# EAGLE board LIS344ALH (EAGLE 9.6.2)
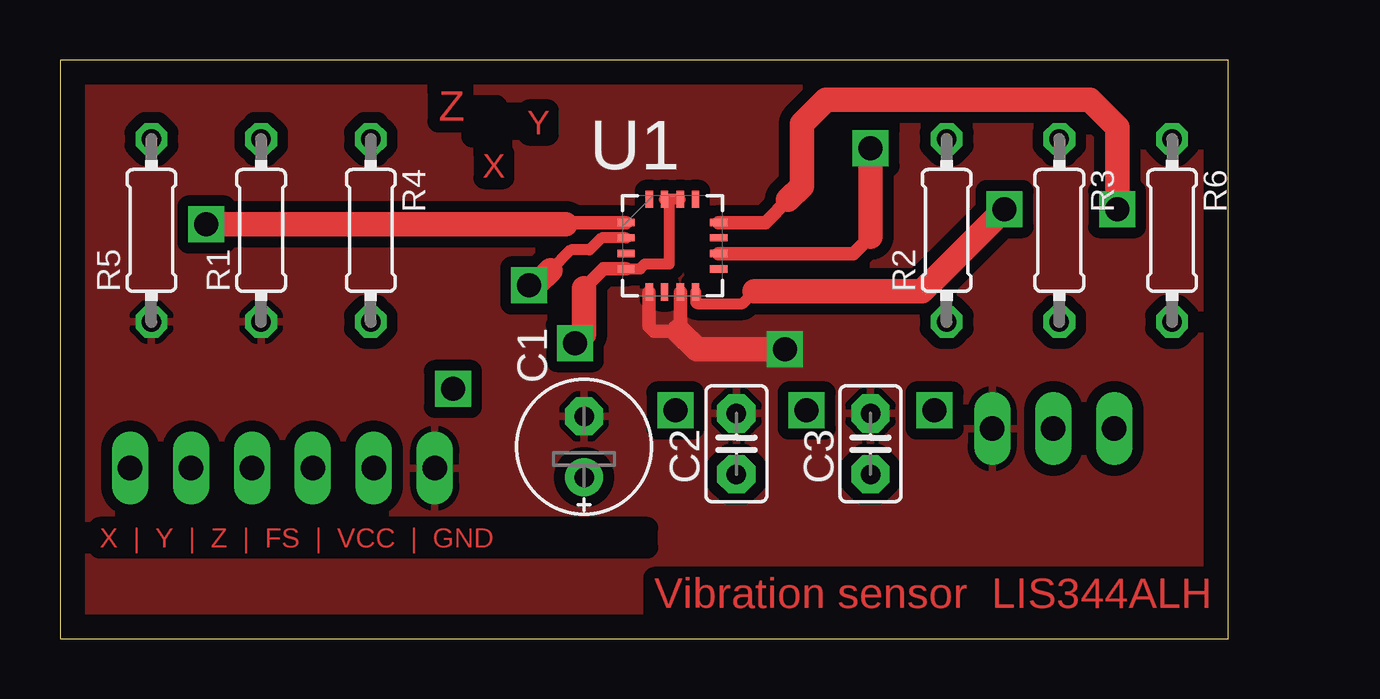
[diagram p0: board, top side]
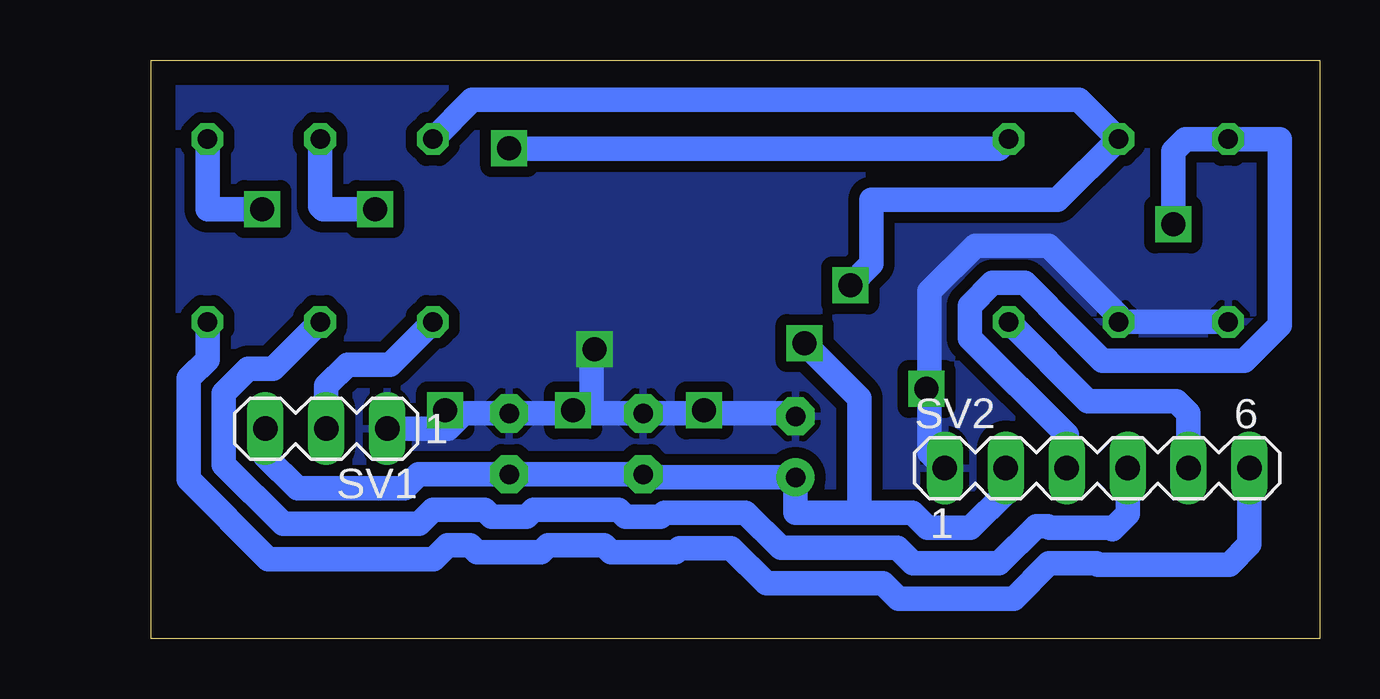
[diagram p1: board, bottom side, seen from below]

Size 48.69 x 24.12 mm. Coordinates in mm from the lower left corner, seen from the top.
Outline: 0,0 48.69,0 48.69,24.12 0,24.12 0,0
Copper layers (1*16): Top 0.035mm / dielectric 1.5mm / Bottom 0.035mm
Design rules "default *": minimum track width 18mil, minimum drill 1mm, track to track 18mil, track to pad 18mil, pad to pad 18mil, via to via 18mil, smd to smd 6mil, copper to edge 40mil, drill to drill 6mil, minimum pad ring 10mil, minimum via ring 8mil, stop-mask expansion 4mil, vias tented up to drill 0mil, thermal gap 10mil

## Footprints (pad centres in the part's own frame; a part is rotated, then mirrored left to right if it is on the bottom)
E2,5-6E = drill 0.813 pad 1.575: + -1.27,0 | drill 0.813 pad 1.575 octagon: - 1.27,0
C2.5-2 = drill 0.813 pad 1.6 octagon: 1 -1.27,0; 2 1.27,0
0204/7 = drill 0.813 octagon: 1 -3.81,0; 2 3.81,0
MA03-1 = drill 1.016 long: 1 -2.54,0; 2 0,0; 3 2.54,0
MA06-1 = drill 1.016 long: 1 -6.35,0; 2 -3.81,0; 3 -1.27,0; 4 1.27,0; 5 3.81,0; 6 6.35,0
LGA16R65P4X4_400X400X160 = smd 0.711 x 0.305: 1 -1.93,0.965; 2 -1.93,0.33; 3 -1.93,-0.33; 4 -1.93,-0.965; 9 1.93,-0.965; 10 1.93,-0.33; 11 1.93,0.33; 12 1.93,0.965 | smd 0.305 x 0.711: 5 -0.965,-1.93; 6 -0.33,-1.93; 7 0.33,-1.93; 8 0.965,-1.93; 13 0.965,1.93; 14 0.33,1.93; 15 -0.33,1.93; 16 -0.965,1.93

## Placement (x,y rotation side)
C1  2.2uF  [E2,5-6E]  21.84,8 90 top
C2  100nF  [C2.5-2]  28.19,8.13 90 top
C3  100nF  [C2.5-2]  33.78,8.13 90 top
R1  100k  [0204/7]  8.38,17.02 90 top
R2  1k  [0204/7]  36.96,17.02 90 top
R3  1k  [0204/7]  41.66,17.02 270 top
R4  1k  [0204/7]  12.95,17.02 270 top
R5  100k  [0204/7]  3.81,17.02 90 top
R6  1k  [0204/7]  46.36,17.02 270 top
SV1  [MA03-1]  41.4,8.76 180 bottom
SV2  [MA06-1]  9.27,7.11 0 bottom
U1  LIS344ALH  [LGA16R65P4X4_400X400X160]  25.53,16.38 0 top

## Library data of the parts
C1 = rcl; SPICEPREFIX: C
C2 C3 = capacitor-wima
R1-R6 = rcl; SPICEPREFIX: R
SV1 SV2 = con-lstb; OC_FARNELL: unknown; OC_NEWARK: unknown
U1 = LIS344ALH; AVAILABILITY: In Stock; CHECK_PRICES: https://www.snapeda.com/parts/LIS344ALH/STMicroelectronics/view-part/?ref=eda; DESCRIPTION: Accelerometer X, Y, Z Axis ±2g, 6g 1.8kHz 16-LGA (4x4); MF: STMicroelectronics; MP: LIS344ALH; PACKAGE: LGA-16 STMicroelectronics; PRICE: None; SNAPEDA_LINK: https://www.snapeda.com/parts/LIS344ALH/STMicroelectronics/view-part/?ref=snap

## Nets
GND: C1.- C2.2 C3.2 R1.1 R5.1 SV1.1 SV2.1 U1.5 U1.7
N$1: R6.1 U1.12
N$2: R4.1 U1.10
N$3: R3.1 U1.8
N$4: R6.2 SV2.6
N$5: R4.2 SV2.5
N$6: R3.2 SV2.4
N$7: R2.1 SV1.2
N$8: R1.2 R2.2 U1.2
N$11: R5.2 SV2.3 U1.1
VCC: C1.+ C2.1 C3.1 SV1.3 SV2.2 U1.4 U1.14 U1.15

## Tracks (layer width: path | path; a pad name or v marks a point on that pad's centre or on a via)
GND  (via drill 1)
  Top 0.559: U1.7 25.86,12.9 25.78,12.83 24.77,12.83 24.56,13.03 U1.5
  Top 1.016: v30.23,12.06 26.54,12.06 25.78,12.83
  Bottom 1.016: C1.- 21.97,9.4 C2.2 30.35,9.4 | 30.35,9.4 C3.2 35.69,9.4 36.32,8.76 SV1.1 | v30.23,12.06 30.35,11.94 30.35,9.4 | R5.1 R1.1 8.38,13.46 11.3,16.38 14.35,16.38 16.26,14.48 16.26,10.67 16.26,7.75 SV2.1
  pour Top: 0,24.13 48.77,24.13 48.77,0 0,0
  pour Bottom: 0,24.13 48.77,24.13 48.77,0 0,0
N$1  (via drill 1)
  Top 0.559: U1.12 29.41,17.35 30.35,18.29
  Top 1.016: 30.35,18.29 30.92,18.86 30.92,21.47 31.93,22.47 42.93,22.47 44.07,21.33 v44.07,17.91
  Bottom 1.016: R6.1 46.36,17.91 v44.07,17.91
N$2  (via drill 1)
  Top 0.559: U1.10 33.07,16.05 33.78,16.76 | v33.78,20.44 v33.78,20.45
  Top 1.016: v33.78,20.44 33.78,16.76
  Bottom 1.016: v33.78,20.44 33.76,20.42 13.36,20.42 R4.1
N$3  (via drill 1)
  Top 0.457: U1.8 26.49,14.02 26.54,13.97 28.45,13.97 28.96,14.48
  Top 1.016: v39.37,17.91 36.3,14.83 36.28,14.83 35.93,14.48 28.96,14.48
  Bottom 1.016: R3.1 41.66,18.03 41.53,17.91 v39.37,17.91
N$4
  Bottom 1.016: R6.2 46.36,11.64 47.14,10.85 47.14,6.65 43.82,3.33 36.93,3.33 36.34,3.91 35.42,3.91 35.12,3.62 32.44,3.62 32.15,3.91 29.83,3.91 29.53,3.62 26.85,3.62 26.69,3.79 24.53,3.79 23.06,2.32 18.2,2.32 17.56,1.68 12.75,1.68 11.28,3.15 9.3,3.15 9.25,3.1 3.76,3.1 2.92,3.94 SV2.6
N$5
  Bottom 1.016: R4.2 9.65,9.91 5.97,9.91 5.46,9.4 SV2.5
N$6
  Bottom 1.016: R3.2 43.61,11.25 44.66,11.25 45.67,10.24 45.67,7.26 43.21,4.8 37.54,4.8 36.95,5.39 34.81,5.39 34.51,5.09 33.05,5.09 32.76,5.39 29.22,5.39 28.92,5.09 27.46,5.09 27.3,5.26 23.92,5.26 22.45,3.79 17.59,3.79 16.95,3.15 13.36,3.15 11.81,4.7 11.33,4.7 11.26,4.62 8.69,4.62 8.64,4.57 8,5.21 SV2.4
N$7
  Bottom 1.016: R2.1 38.73,11.43 40.51,11.43 41.4,10.54 SV1.2
N$8  (via drill 1)
  Top 0.457: U1.2 22.58,16.71 22.07,16.2 21.28,16.2 20.45,15.37
  Top 1.016: v19.56,14.73 19.81,14.73 20.45,15.37
  Bottom 1.016: R2.2 35.32,22.47 10.02,22.47 R1.2 10.92,18.29 18.67,18.29 18.67,15.62 v19.56,14.73
N$9  (via drill 1 pad 0.38)
  other vias: 25.65,9.52
N$10  (via drill 1 pad 0.38)
  other vias: 31.11,9.52
N$11  (via drill 1)
  Top 0.559: U1.1 21.16,17.35 21.08,17.27
  Top 1.016: 21.08,17.27 v6.1,17.27
  Bottom 1.016: SV2.3 10.54,8.5 14.58,12.54 14.58,13.88 13.63,14.83 12.28,14.83 11.33,13.88 11.33,13.86 9.05,11.58 3.14,11.58 1.65,13.07 1.65,20.83 R5.2 5.59,20.83 6.1,20.32 v6.1,17.27
N$12  (via drill 1 pad 0.38)
  other vias: 36.45,9.52
N$13  (via drill 1 pad 0.38)
  other vias: 16.38,10.41
VCC  (via drill 1)
  Top 0.457: U1.14 U1.15 25.4,18.11 25.4,15.62 24.38,15.62 24.18,15.42 U1.4
  Top 0.559: 21.84,14.61 22.66,15.42 U1.4
  Top 1.016: v21.46,12.32 21.84,12.7 21.84,14.61
  Bottom 1.016: 19.18,5.26 21.84,5.26 C1.+ 28.07,6.73 C2.1 C3.1 37.56,6.86 38.15,6.27 42.6,6.27 43.94,7.62 SV1.3 | 19.18,5.26 16.98,5.26 16.34,4.62 14.55,4.62 13.08,6.1 SV2.2 | 19.18,5.26 19.18,10.03 v21.46,12.32

## Text on the board
Top: Z | 🠗 | Y | ✧ | X | 🠗 | X | Y | Z | FS | VCC | GND | Vibration sensor LIS344ALH